# EAGLE board bridge_rp_dlp_v2 (EAGLE 9.6.2)
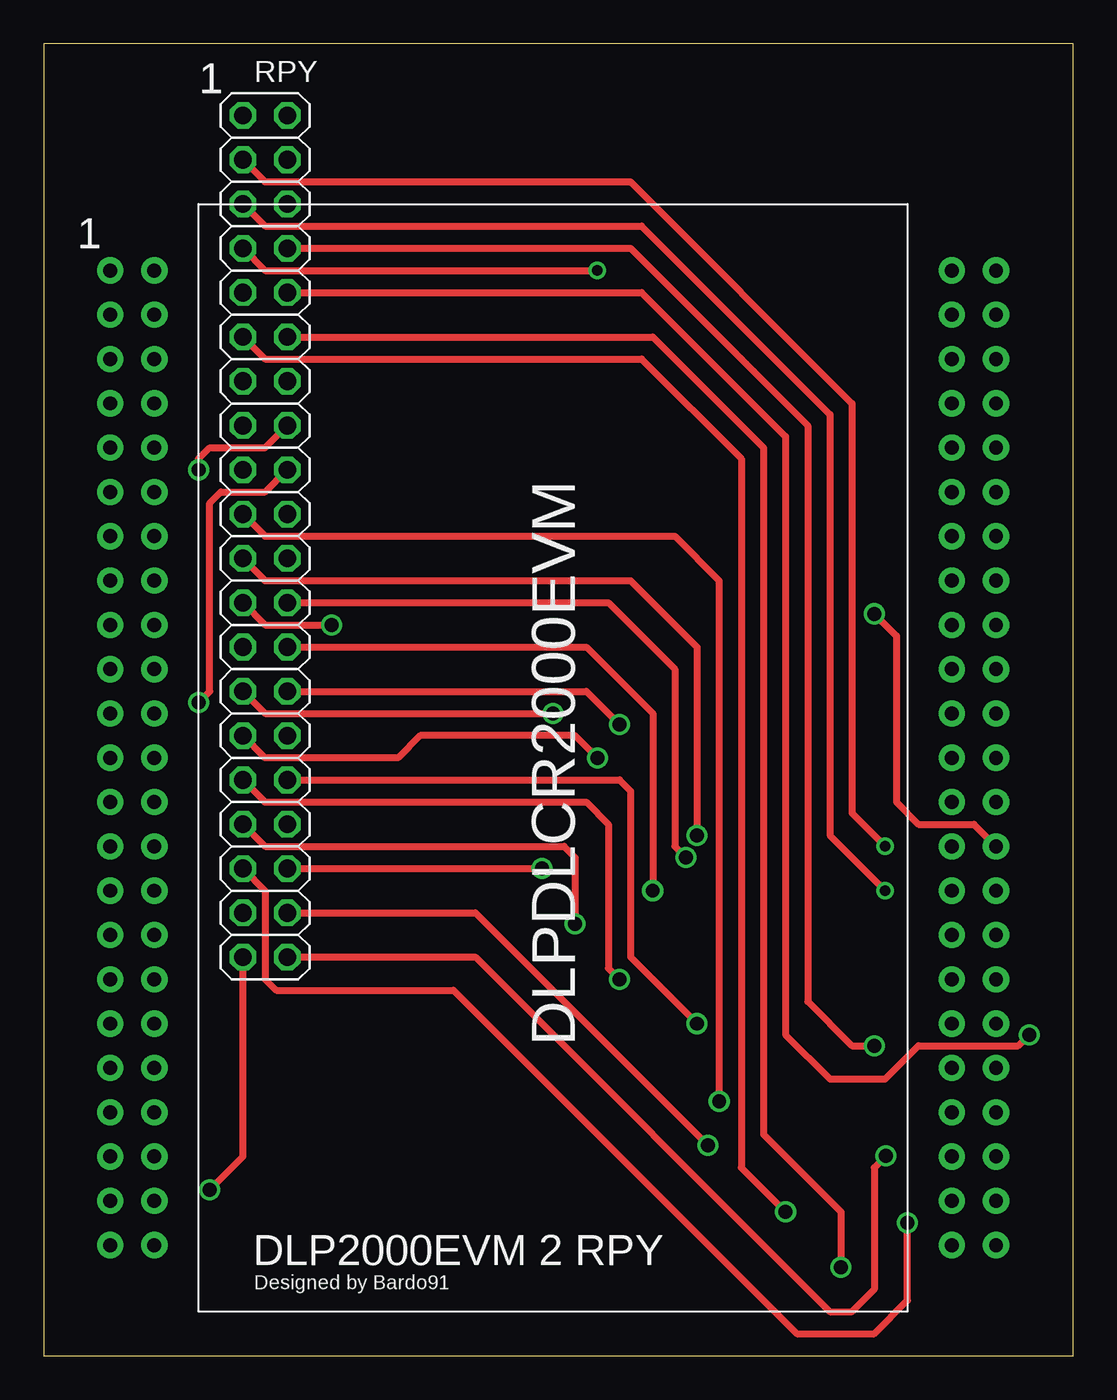
[diagram p0: board, top side]
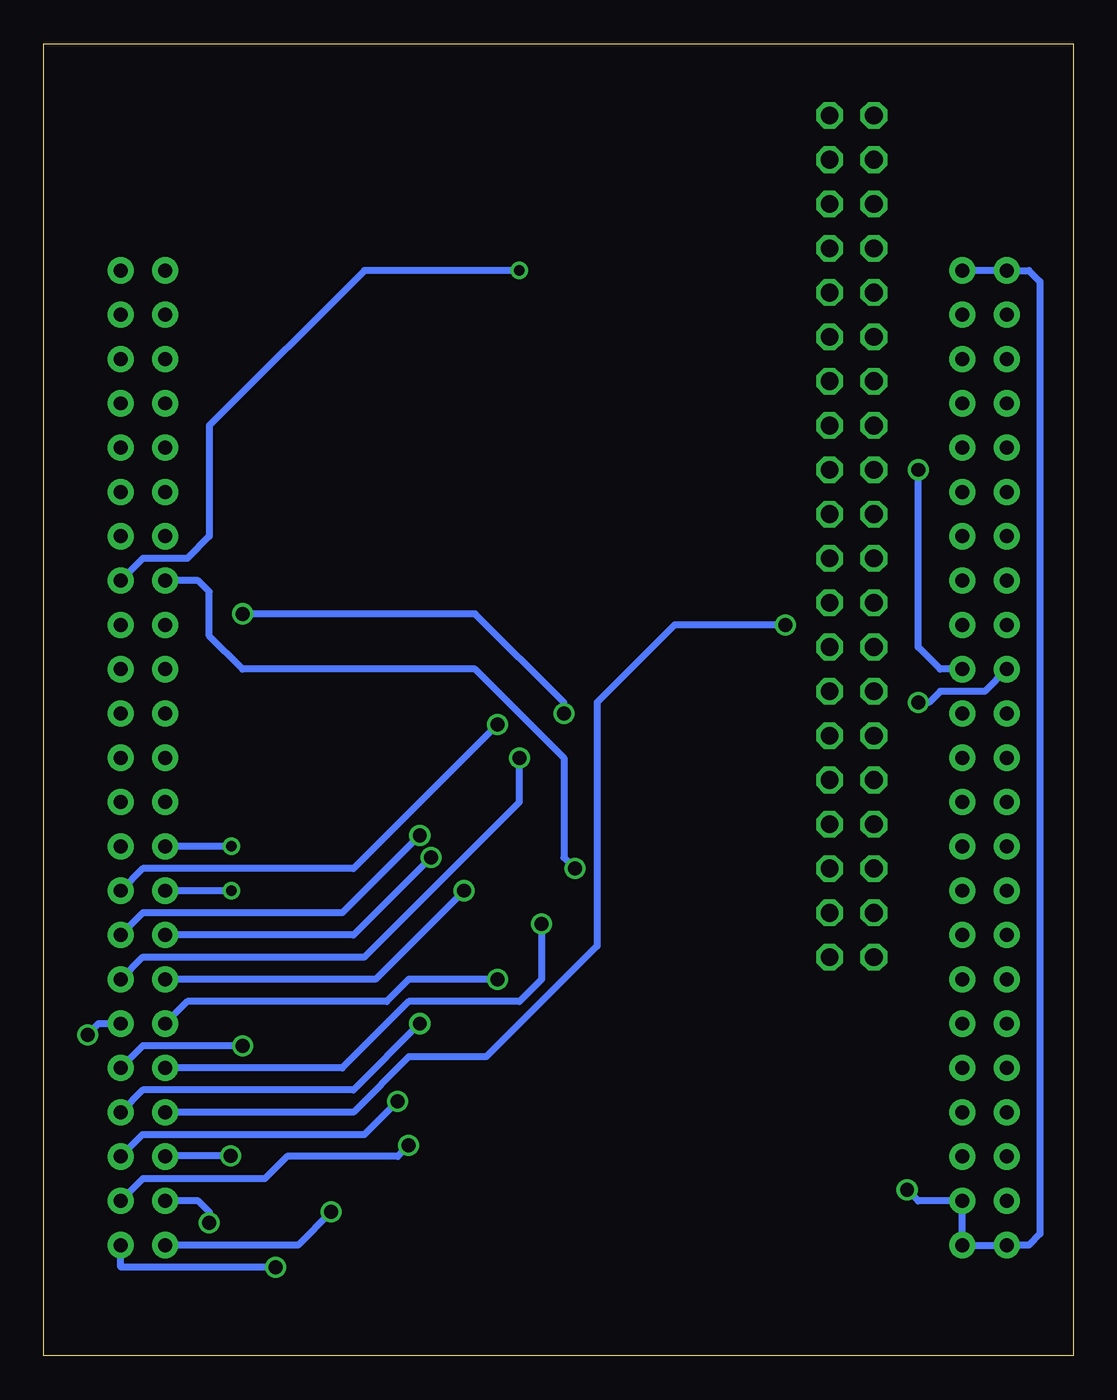
[diagram p1: board, bottom side, seen from below]

Size 59.04 x 75.23 mm. Coordinates in mm from the lower left corner, seen from the top.
Outline: 0,0 59.04,0 59.04,75.23 0,75.23 0,0
Copper layers (1*16): Top 0.035mm / dielectric 1.5mm / Bottom 0.035mm
Design rules "default": minimum track width 6mil, minimum drill 0.35mm, track to track 6mil, track to pad 6mil, pad to pad 6mil, via to via 6mil, smd to smd 6mil, copper to edge 40mil, drill to drill 6mil, minimum pad ring 10mil, minimum via ring 8mil, stop-mask expansion 4mil, vias tented up to drill 0mil, thermal gap 10mil

## Footprints (pad centres in the part's own frame; a part is rotated, then mirrored left to right if it is on the bottom)
2X20 = drill 1.016 octagon: 1 -24.13,-1.27; 2 -24.13,1.27; 3 -21.59,-1.27; 4 -21.59,1.27; 5 -19.05,-1.27; 6 -19.05,1.27; 7 -16.51,-1.27; 8 -16.51,1.27; 9 -13.97,-1.27; 10 -13.97,1.27; 11 -11.43,-1.27; 12 -11.43,1.27; 13 -8.89,-1.27; 14 -8.89,1.27; 15 -6.35,-1.27; 16 -6.35,1.27; 17 -3.81,-1.27; 18 -3.81,1.27; 19 -1.27,-1.27; 20 -1.27,1.27; 21 1.27,-1.27; 22 1.27,1.27; 23 3.81,-1.27; 24 3.81,1.27; 25 6.35,-1.27; 26 6.35,1.27; 27 8.89,-1.27; 28 8.89,1.27; 29 11.43,-1.27; 30 11.43,1.27; 31 13.97,-1.27; 32 13.97,1.27; 33 16.51,-1.27; 34 16.51,1.27; 35 19.05,-1.27; 36 19.05,1.27; 37 21.59,-1.27; 38 21.59,1.27; 39 24.13,-1.27; 40 24.13,1.27
DLPDLCR2000EVM = drill 0.8 pad 1.5: DATA0 48.26,-55.88; DATA1 50.8,-55.88; DATA2 48.26,-53.34; DATA3 50.8,-53.34; DATA4 48.26,-50.8; DATA5 50.8,-50.8; DATA6 48.26,-48.26; DATA7 50.8,-48.26; DATA8 48.26,-45.72; DATA9 50.8,-45.72; DATA10 50.8,-43.18; DATA11 50.8,-40.64; DATA12 48.26,-43.18; DATA13 48.26,-40.64; DATA14 48.26,-38.1; DATA15 50.8,-38.1; DATA16 48.26,-17.78; DATA17 50.8,-17.78; DATA18 48.26,-12.7; DATA19 50.8,-12.7; DATA20 48.26,-20.32; DATA21 50.8,-15.24; DATA22 48.26,-15.24; DATA23 48.26,-22.86; DATAEN 50.8,-35.56; EXT_SCL 0,-22.86; EXT_SDA 2.54,-22.86; GND_1 0,0; GND_2 2.54,0; GND_3 2.54,-53.34; GND_4 0,-55.88; GND_5 2.54,-55.88; GPIO5 50.8,-20.32; GPIO_INIT_DONE 50.8,-30.48; HOST_PRESENTZ 0,-53.34; HSYNC 48.26,-35.56; P$4 2.54,-2.54; P$5 0,-5.08; P$6 2.54,-5.08; P$7 0,-7.62; P$8 2.54,-7.62; P$9 0,-10.16; P$10 2.54,-10.16; P$11 0,-12.7; P$12 2.54,-12.7; P$13 0,-15.24; P$14 2.54,-15.24; P$16 2.54,-17.78; P$17 0,-20.32; P$18 2.54,-20.32; P$21 0,-25.4; P$22 2.54,-25.4; P$23 0,-27.94; P$24 2.54,-27.94; P$25 0,-30.48; P$26 2.54,-30.48; P$27 0,-33.02; P$28 2.54,-33.02; P$29 0,-35.56; P$30 2.54,-35.56; P$31 0,-38.1; P$32 2.54,-38.1; P$33 0,-40.64; P$34 2.54,-40.64; P$35 0,-43.18; P$36 2.54,-43.18; P$37 0,-45.72; P$38 2.54,-45.72; P$39 0,-48.26; P$40 2.54,-48.26; P$41 0,-50.8; P$42 2.54,-50.8; P$47 48.26,0; P$48 50.8,0; P$49 48.26,-2.54; P$50 50.8,-2.54; P$51 48.26,-5.08; P$52 50.8,-5.08; P$53 48.26,-7.62; P$54 50.8,-7.62; P$55 48.26,-10.16; P$56 50.8,-10.16; P$66 50.8,-22.86; P$67 48.26,-25.4; P$68 50.8,-25.4; P$69 48.26,-27.94; P$70 50.8,-27.94; P$71 48.26,-30.48; PCLK 50.8,-33.02; PROJ_ON_EXT 0,-17.78; VSYNC 48.26,-33.02; VTINF 0,-2.54

## Placement (x,y rotation side)
RPY  [2X20]  12.7,46.99 270 top
U$1  DLPDLCR2000EVM  [DLPDLCR2000EVM]  3.81,62.23 0 top

## Library data of the parts
RPY = pinhead
U$1 = DLP_lib

## Nets
DATA0: RPY.11 U$1.DATA0
DATA1: RPY.12 U$1.DATA1
DATA2: RPY.35 U$1.DATA2
DATA3: RPY.38 U$1.DATA3
DATA4: RPY.40 U$1.DATA4
DATA5: RPY.19 U$1.DATA5
DATA6: RPY.23 U$1.DATA6
DATA7: RPY.32 U$1.DATA7
DATA8: RPY.33 U$1.DATA8
DATA9: RPY.8 U$1.DATA9
DATA10: RPY.10 U$1.DATA10
DATA11: RPY.29 U$1.DATA11
DATA12: RPY.31 U$1.DATA12
DATA13: RPY.26 U$1.DATA13
DATA14: RPY.24 U$1.DATA14
DATA15: RPY.21 U$1.DATA15
DATA16: RPY.36 U$1.DATA16
DATA17: RPY.7 U$1.DATA17
DATAEN: RPY.28 U$1.DATAEN
GND: RPY.39 U$1.GND_1 U$1.GND_2 U$1.GND_3 U$1.GND_4 U$1.GND_5
HSYNC: RPY.5 U$1.HSYNC
PCLK: RPY.27 U$1.PCLK
SCL: RPY.18 U$1.EXT_SCL
SDA: RPY.16 U$1.EXT_SDA
VSYNC: RPY.3 U$1.VSYNC

## Tracks (layer width: path | path; a pad name or v marks a point on that pad's centre or on a via)
DATA0  (via drill 0.8)
  Top 0.406: RPY.11 12.7,57.15 34.29,57.15 40.01,51.43 40.01,10.79 v42.55,8.26
  Bottom 0.406: v42.55,8.26 44.45,6.35 U$1.DATA0
DATA1  (via drill 0.8)
  Top 0.406: RPY.12 34.92,58.42 41.27,52.07 41.27,12.7 45.72,8.26 v45.72,5.08
  Bottom 0.406: v45.72,5.08 54.61,5.08 U$1.DATA1
DATA2  (via drill 0.8)
  Top 0.406: RPY.35 12.7,26.67 12.7,21.59 13.34,20.95 23.49,20.95 43.18,1.27 47.62,1.27 49.53,3.18 v49.53,7.62
  Bottom 0.406: v49.53,7.62 49.53,8.26 50.16,8.89 U$1.DATA2
DATA3  (via drill 0.8)
  Top 0.406: RPY.38 24.77,25.4 v38.1,12.06
  Bottom 0.406: v38.1,12.06 38.73,11.43 45.09,11.43 46.35,10.16 53.34,10.16 U$1.DATA3
DATA4  (via drill 0.8)
  Top 0.406: RPY.40 24.77,22.86 45.09,2.54 46.35,2.54 47.62,3.81 47.62,10.79 v48.3,11.47
  Bottom 0.406: v48.3,11.47 52.03,11.47 U$1.DATA4
DATA5  (via drill 0.8)
  Top 0.406: RPY.19 12.7,46.99 36.2,46.99 38.73,44.45 v38.73,14.6
  Bottom 0.406: v38.73,14.6 40.64,12.7 53.34,12.7 U$1.DATA5
DATA6  (via drill 0.8)
  Top 0.406: RPY.23 12.7,41.91 v16.51,41.91
  Bottom 0.406: U$1.DATA6 41.27,13.97 38.1,17.15 33.66,17.15 27.3,23.49 27.3,37.46 22.86,41.91 v16.51,41.91
DATA7  (via drill 0.8)
  Top 0.406: RPY.32 33.02,33.02 33.66,32.38 33.66,22.86 v37.47,19.05
  Bottom 0.406: v37.47,19.05 41.27,15.24 53.34,15.24 U$1.DATA7
DATA8  (via drill 0.8)
  Top 0.406: RPY.33 12.7,29.21 29.84,29.21 30.48,28.57 v30.48,24.77
  Bottom 0.406: v30.48,24.77 30.48,21.59 31.75,20.32 38.1,20.32 41.91,16.51 U$1.DATA8
DATA9  (via drill 0.8)
  Top 0.406: RPY.8 33.66,63.5 43.81,53.34 43.81,20.32 46.35,17.78 v47.62,17.78
  Bottom 0.406: v47.62,17.78 53.34,17.78 U$1.DATA9
DATA10  (via drill 0.8)
  Top 0.406: RPY.10 34.29,60.96 42.55,52.7 42.55,18.41 45.09,15.88 48.26,15.88 50.16,17.78 55.88,17.78 v56.51,18.41
  Bottom 0.406: v56.51,18.41 55.88,19.05 U$1.DATA10
DATA11  (via drill 0.8)
  Top 0.406: v31.75,34.29 30.48,35.56 21.59,35.56 20.32,34.29 12.7,34.29 RPY.29
  Bottom 0.406: U$1.DATA11 53.34,22.86 40.64,22.86 31.75,31.75 v31.75,34.29
DATA12  (via drill 0.8)
  Top 0.406: RPY.31 12.7,31.75 31.12,31.75 32.38,30.48 32.38,22.23 v33.02,21.59
  Bottom 0.406: v33.02,21.59 38.1,21.59 39.37,20.32 50.8,20.32 U$1.DATA12
DATA13  (via drill 0.8)
  Top 0.406: RPY.26 31.12,40.64 34.92,36.83 v34.92,26.67
  Bottom 0.406: U$1.DATA13 40.01,21.59 v34.92,26.67
DATA14  (via drill 0.8)
  Top 0.406: RPY.24 32.38,43.18 36.2,39.37 36.2,29.21 v36.83,28.57
  Bottom 0.406: v36.83,28.57 41.27,24.13 U$1.DATA14
DATA15  (via drill 0.8)
  Top 0.406: RPY.21 12.7,44.45 33.66,44.45 37.47,40.64 v37.47,29.84
  Bottom 0.406: v37.47,29.84 41.91,25.4 53.34,25.4 U$1.DATA15
DATA16  (via drill 0.8)
  Top 0.406: RPY.36 v28.58,27.94
  Bottom 0.406: v28.58,27.94 29.21,28.57 29.21,34.29 34.29,39.37 47.62,39.37 49.53,41.27 49.53,43.81 50.16,44.45 U$1.DATA16
DATA17  (via drill 0.6)
  Top 0.406: RPY.7 12.7,62.23 v31.75,62.23
  Bottom 0.406: v31.75,62.23 40.64,62.23 49.53,53.34 49.53,46.99 50.8,45.72 53.34,45.72 U$1.DATA17
DATAEN  (via drill 0.8)
  Top 0.406: RPY.28 31.12,38.1 v33.02,36.2
  Bottom 0.406: v33.02,36.2 41.27,27.94 53.34,27.94 U$1.DATAEN
GND  (via drill 0.8)
  Top 0.406: v9.52,9.53 11.43,11.43 RPY.39
  Bottom 0.406: U$1.GND_2 U$1.GND_1 2.54,62.23 1.91,61.59 1.91,6.99 2.54,6.35 U$1.GND_4 U$1.GND_5 U$1.GND_3 8.89,8.89 v9.52,9.53
HSYNC  (via drill 0.6)
  Top 0.406: RPY.5 12.7,64.77 34.29,64.77 45.09,53.98 45.09,29.84 v48.26,26.67
  Bottom 0.406: v48.26,26.67 U$1.HSYNC
PCLK  (via drill 0.8)
  Top 0.406: RPY.27 12.7,36.83 v29.21,36.83 | v47.62,42.55 48.9,41.27 48.9,31.75 50.16,30.48 53.34,30.48 U$1.PCLK
  Bottom 0.406: v29.21,36.83 29.21,37.46 34.29,42.55 v47.62,42.55
SCL  (via drill 0.8)
  Top 0.406: v8.89,37.46 9.52,38.1 9.52,48.89 10.16,49.53 12.7,49.53 RPY.18
  Bottom 0.406: U$1.EXT_SCL 5.08,38.1 7.62,38.1 8.25,37.46 v8.89,37.46
SDA  (via drill 0.8)
  Top 0.406: v8.89,50.8 8.89,51.43 9.52,52.07 12.7,52.07 RPY.16
  Bottom 0.406: U$1.EXT_SDA 7.62,39.37 8.89,40.64 v8.89,50.8
VSYNC  (via drill 0.6)
  Top 0.406: RPY.3 12.7,67.31 33.66,67.31 46.35,54.61 46.35,31.12 v48.26,29.21
  Bottom 0.406: v48.26,29.21 U$1.VSYNC

## Text on the board
tNames: 1 | 1 | DLP2000EVM 2 RPY | Designed by Bardo91